# Altium PCB BUCK_CONVERTER.PcbDoc
Units mil, origin at the board's own origin, x right, y up, seen from the top; angles counter-clockwise.
Board outline 1155 x 780 mil, 2 copper layers (Top Layer, Bottom Layer); 9 components, 4 nets, 24 pads, 0 vias.
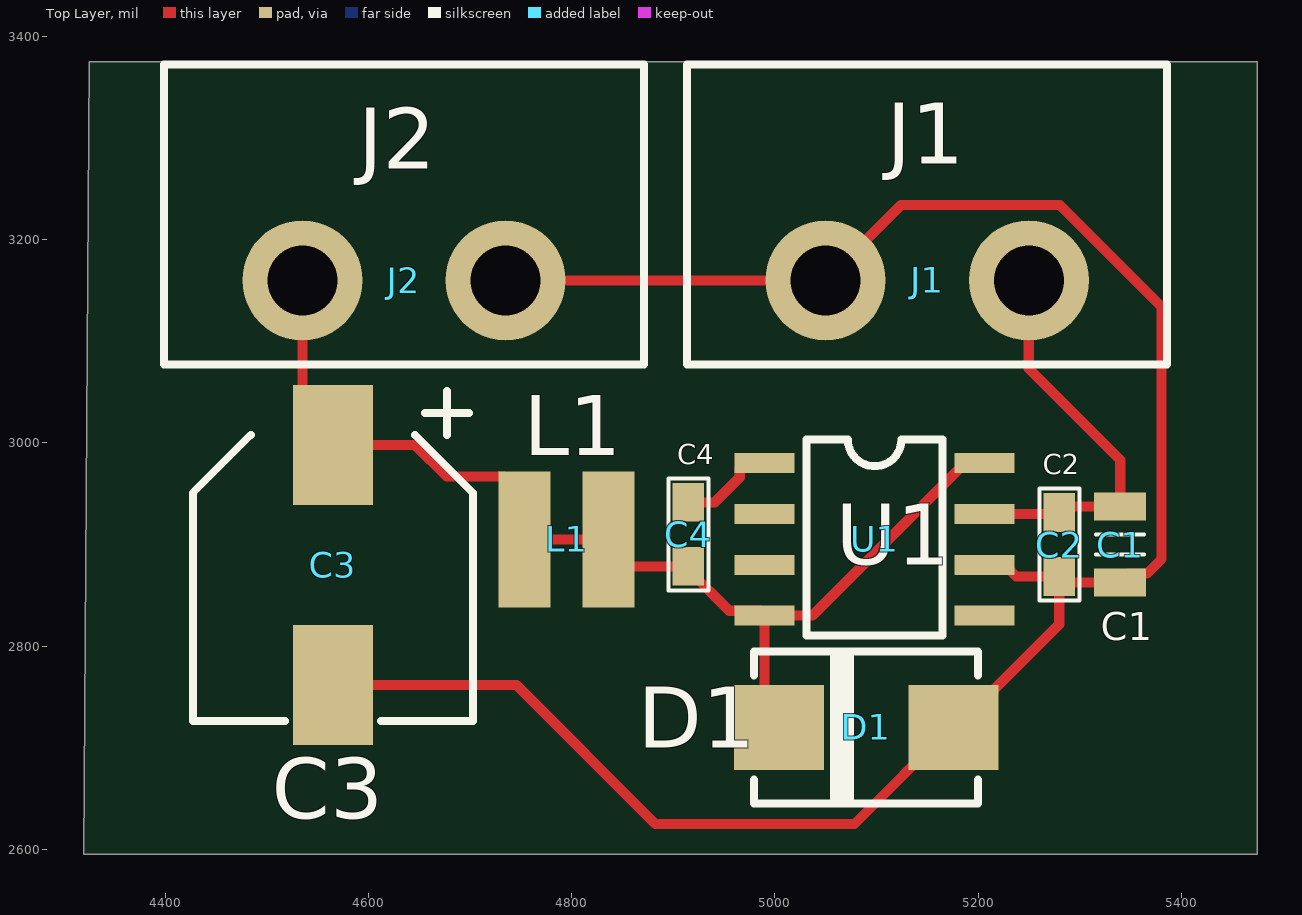
[diagram p0: Top Layer view]
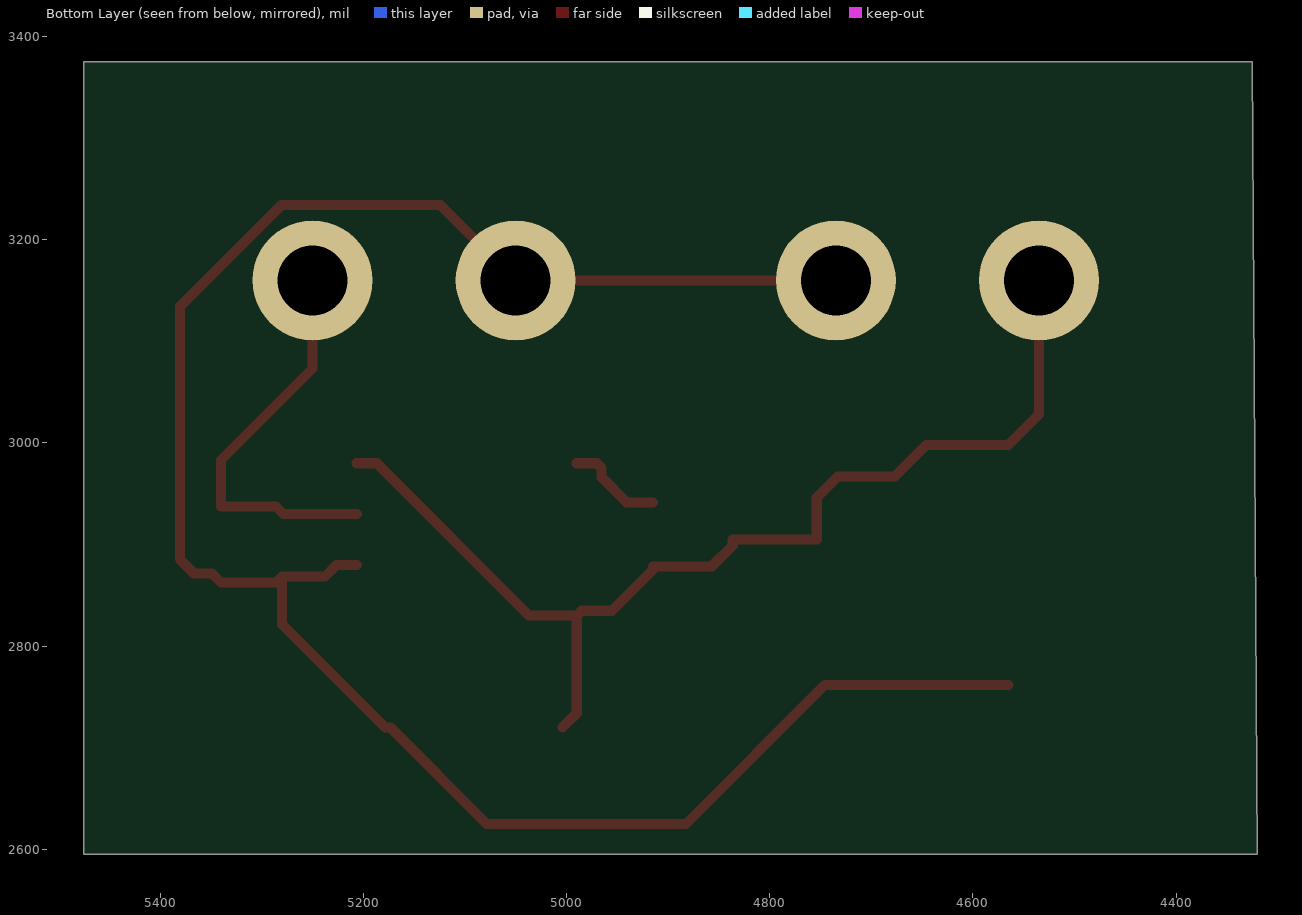
[diagram p1: Bottom Layer view, seen from below]
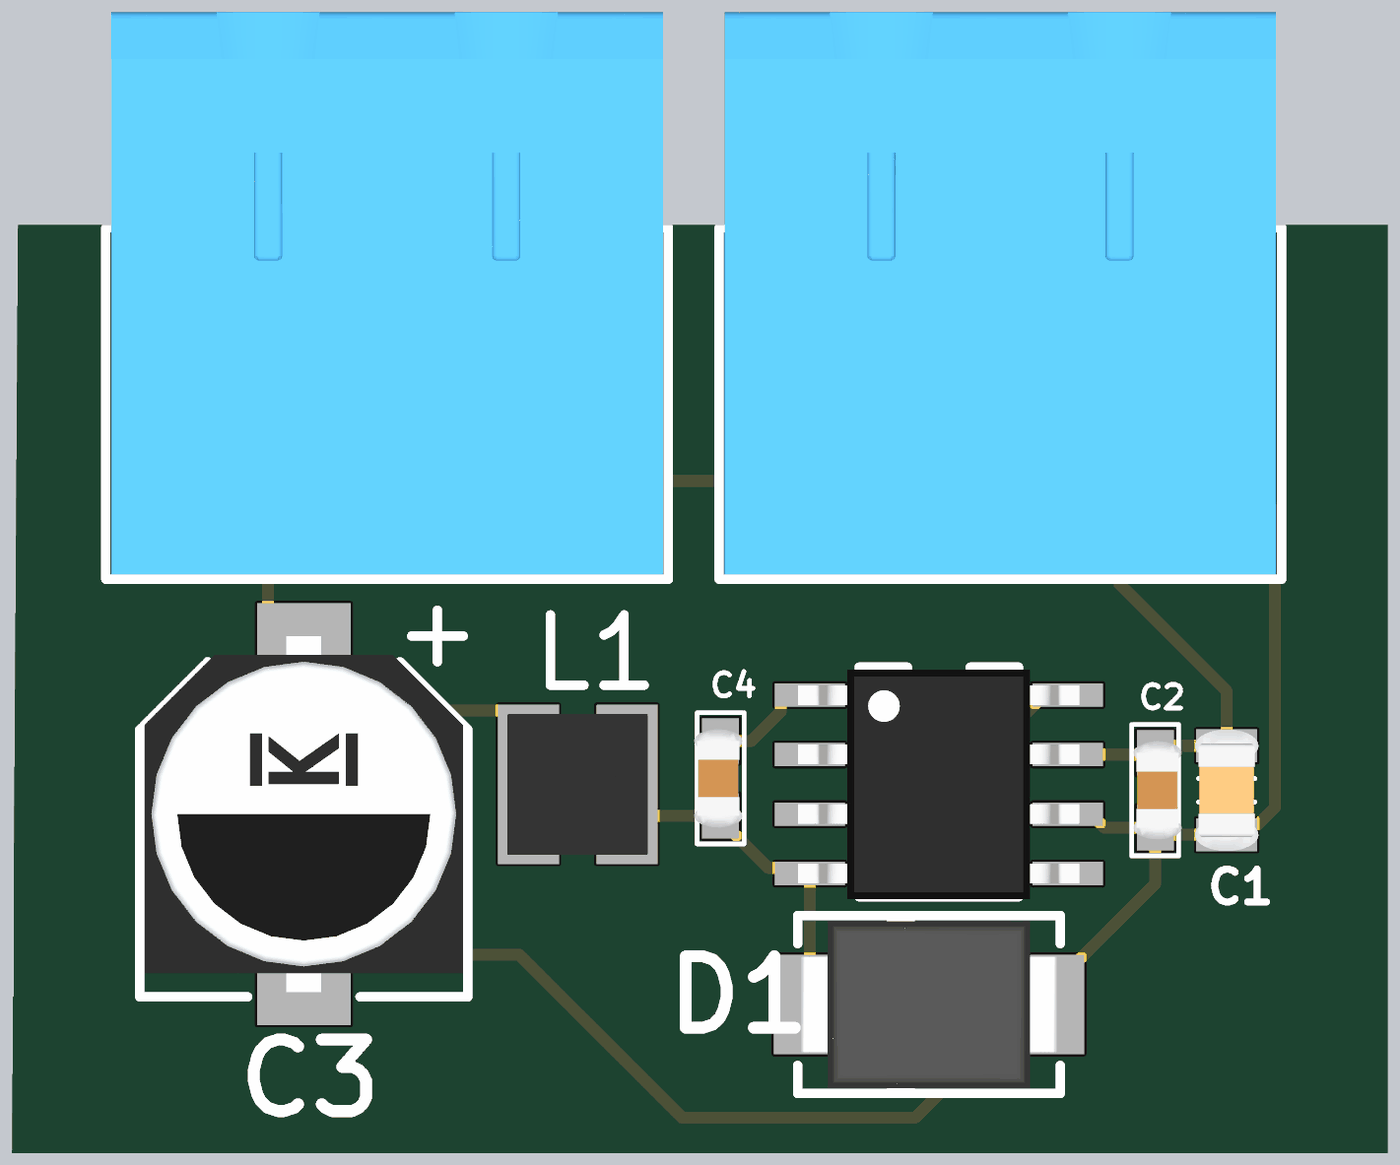
[diagram p2: 3D render of the assembled board from above, using the file's embedded part models]

## Layer stack, top to bottom
Top Solder: solder mask 0.4, Solder Resist, Dk 3.5
Top Layer: signal copper 1.4
Dielectric 1: dielectric 12.6, FR-4, Dk 4.8
Bottom Layer: signal copper 1.4
Bottom Solder: solder mask 0.4, Solder Resist, Dk 3.5

## Board outline
4325,3375 5475,3375 5475,2595 4320,2595

## Design rules (kind name [scope] priority, off if disabled: settings)
Clearance [All] p1: gap=10 ignorepadtopadclearanceinfootprint=FALSE
PolygonConnect [All] p1: connectstyle=Relief reliefconductorwidth=10 reliefentries=4 polygonreliefangle="90 Angle" airgapwidth=10
RoutingVias [All] p1: holewidth=28 width=50 viastyle="Through Hole" minholewidth=28 minwidth=50 maxholewidth=28 maxwidth=50
SolderMaskExpansion [All] p1: expansion=4 istentingtop=FALSE
Width [All] p1: maxlimit=10 minlimit=10 preferedwidth=10
30 further rules are at their usual default settings.

## Classes and differential pairs
component class buck_converter: C1 C2 C3 C4 D1 J2 L1 U1

## Components (designator, comment, footprint, x,y, rotation, side; value= is the part's Value field where it differs from the comment)
C1 "CL21B105KBFNNNE" CAP_0805 5340,2900 r90 top
C2 "0603B103K160CT" CAP_0603 5280,2900 r90 top
C3 "EEV686M035A9HAA" CAP_EEVseries 4565,2880 r270 top
C4 "0603B103K160CT" CAP_0603 4915,2910 r270 top
D1 "1SMB5919BT3G" SMB 5090,2720 r0 top
J1 "TBP01R1-508-02BE" TBP01R1-508 5150,3160 r180 top
J2 "TBP01R1-508-02BE" TBP01R1-508 4635,3160 r180 top
L1 "78438335470" IND_1212 4795,2905 r0 top
U1 "LM2675MX-12/NOPB" SOIC8 5098.27,2905 r270 top

## Footprints (in the part's own frame and the unit in brackets; to place one, negate y for a bottom-side part, rotate by r counter-clockwise, add the part's x,y. Pads: shape width x height; smd on the part's side, far side on the other; paste and mask are expansions set on the pad)
CAP_0603 [mil]
  rect 38x31 smd mask+1.97: 1(-31.5,0) 2(31.5,0)
  silkscreen extent -55,-20 55,20, body extent -41,-22 41,18, height 31
CAP_0805 [mm]
  rect 0.7x1.3 smd mask+0.05: 1(-0.95,0) 2(0.95,0)
  silkscreen extent -0.25,-0.6 0.25,0.6, body extent -1.3,-0.68 1.3,0.68, height 0.9
CAP_EEVseries [mm]
  rect 3x2 smd mask+0.05: 1(-3,0) 2(3,0)
  silkscreen extent -4.35,-3.5 3.9,3.5, body extent -3.8,-3.4 3.8,3.4, height 8.01
IND_1212 [mm]
  rect 1.3x3.4 smd mask+0.05: 1(-1.05,0) 2(1.05,0)
  body extent -1.5,-1.5 1.5,1.5, height 1.2
SMB [mm]
  rect 2.25x2.12 smd mask+0.05: A(2.185,0) C(-2.185,0)
  silkscreen extent -2.8,-1.9 2.8,1.9, body extent -2.72,-1.78 2.72,1.78, height 2.44
SOIC8 [mm]
  rect 0.5x1.5 smd mask+0.05: 1(-1.905,-2.75) 2(-0.635,-2.75) 3(0.635,-2.75) 4(1.905,-2.75) 5(1.905,2.75) 6(0.635,2.75) 7(-0.635,2.75) 8(-1.905,2.75)
  silkscreen extent -2.5,-1.7 2.4,1.7, body extent -2.45,-3 2.45,3, height 1.75
TBP01R1-508 [mm]
  round 3 hole 1.75 mask+0.05: 1(-2.54,0) 2(2.54,0)
  silkscreen extent -6,-5.4 6,2.1, body extent -5.88,-10 5.88,2, height 8.55

## Part data
C1: library part "CAP CER 1uF 0805", "CAP CER 1uF %10 0805", Capacitance=1uF, Case Code (Metric)=2012, Case Code (Imperial)=0805, Dielectric=X7R, Manufacturer=Samsung, Max Operating Temperature=125°C, Min Operating Temperature=-55°C, Package Quantity=1, Supplier Part Number 1=1276-1029-2-ND, Tolerance=10%, Voltage=50V, Case/Package=0805, Category="Ceramic Capacitors", ComponentLink1Description=https://datasheet.ciiva.com/25800/cl21b105kbfnnne-25800291.pdf?src-supplier=Digi-Key, ComponentLink1URL=https://datasheet.ciiva.com/25800/cl21b105kbfnnne-25800291.pdf?src-supplier=Digi-Key, ComponentLink2Description=https://datasheet.ciiva.com/16449/cl21b105kbfnnne-16449003.pdf?src-supplier=Future+Electronics, ComponentLink2URL=https://datasheet.ciiva.com/16449/cl21b105kbfnnne-16449003.pdf?src-supplier=Future+Electronics, ComponentLink3Description=https://datasheet.ciiva.com/26838/getdatasheetpartid-354075-26838668.pdf?src-supplier=Verical, ComponentLink3URL=https://datasheet.ciiva.com/26838/getdatasheetpartid-354075-26838668.pdf?src-supplier=Verical, Construction=Flat, Depth=1.25mm, Designed by="Yusuf DALAK", Height=1.25mm, Length=2mm, Manufacturer Part Number=CL21B105KBFNNNE, Mount="Surface Mount", Packaging="Tape and Reel", Pricing 1="2000=0,02138, 4000=0,01956 (USD)", Radiation Hardening=No, RoHS=Yes, RoHS Compliant=Yes, Series=CL, Stock 1=958000, Supplier 1=Digi-Key, Thickness=0.053inch, Voltage Rating=50V, Width=0.049inch
C2 C4: library part "CAP CER 10nF 0603", "CAP CER 10nF %10 0603", Capacitance=10nF, Case Code (Metric)=1608, Case Code (Imperial)=0603, Dielectric=X7R, Manufacturer="Walsin Technologies", Max Operating Temperature=125°C, Min Operating Temperature=-55°C, Supplier Part Number 1=1292-1384-1-ND, Tolerance=10%, Voltage Rating=16V, Case/Package=0603, Category="Ceramic Capacitors", ComponentLink1Description=http://www.farnell.com/datasheets/1958513.pdf?src-supplier=Farnell, ComponentLink1URL=http://www.farnell.com/datasheets/1958513.pdf?src-supplier=Farnell, ComponentLink2Description=http://components.arrow.com/part/dataview/0323_00656382?src-supplier=Arrow+Europe, ComponentLink2URL=http://components.arrow.com/part/dataview/0323_00656382?src-supplier=Arrow+Europe, ComponentLink3Description=http://www.farnell.com/datasheets/1958513.pdf?src-supplier=Element14, ComponentLink3URL=http://www.farnell.com/datasheets/1958513.pdf?src-supplier=Element14, ComponentLink4Description=http://www.passivecomponent.com/wp-content/uploads/2018/10/MLCC.pdf?src-supplier=Digi-Key, ComponentLink4URL=http://www.passivecomponent.com/wp-content/uploads/2018/10/MLCC.pdf?src-supplier=Digi-Key, Depth=0.8mm, Designed by="Yusuf DALAK", Length=1.6mm, Manufacturer Part Number=0603B103K160CT, Packaging="Tape and Reel", Pricing 1="1=0,10000, 10=0,03600, 50=0,01940, 100=0,01590, 500=0,01136, 1000=0,00892 (USD)", REACH SVHC=Unknown, RoHS=Yes, RoHS Compliant=Yes, Stock 1=102474, Supplier 1=Digi-Key, Voltage Rating (DC)=16V
C3: library part "CAP ALU 68uF", "Cap Aluminum Lytic 68uF 35V 20% (6.3 X 7.7mm) SMD 280mA 2000h 105C T/R", Capacitance=68uF, Case/Package=Radial, Manufacturer=KEMET, Max Operating Temperature=105°C, Min Operating Temperature=-40°C, Package Quantity=1, Ripple Current=196mA, Supplier Part Number 1=399-6722-1-ND, Tolerance=20%, Voltage Rating=35V, Category="Aluminum Electrolytic Capacitors", ComponentLink1Description=https://datasheet.ciiva.com/5365/kem-a4002-eev-535332-5365784.pdf?src-supplier=Mouser, ComponentLink1URL=https://datasheet.ciiva.com/5365/kem-a4002-eev-535332-5365784.pdf?src-supplier=Mouser, Designator by="Yusuf DALAK", Height - Seated (Max)=0.315inch, Length=7.7mm, Life (Hours)=2000Hour, Manufacturer Part Number=EEV686M035A9HAA, Mount="Surface Mount", Packaging="Tape and Reel", Pricing 1="1=0,54000, 10=0,38000, 50=0,28740, 100=0,25040, 500=0,18546 (USD)", RoHS=Yes, RoHS Compliant=Yes, Series=EEV, Stock 1=543, Supplier 1=Digi-Key, Termination=SMD/SMT, Voltage Rating (DC)=35V, Impedance=340mR
D1: "Diode Zener Single 5.6V 5% 3W 2-Pin SMB T/R", Breakdown Voltage=5.88V, Case/Package=SMB, Forward Voltage=1.5V, Manufacturer="ON Semiconductor", Max Operating Temperature=150°C, Max Power Dissipation=3W, Max Reverse Current=5uA, Min Operating Temperature=-65°C, Package Quantity=1, Power Dissipation=550mW, Supplier Part Number 1=1SMB5919BT3GOSCT-ND, Test Current=66.9mA, Tolerance=5%, Voltage Rating (DC)=5.6V, Zener Current=267mA, Category="Zener Diodes", ComponentLink1Description=https://datasheet.ciiva.com/27747/1308331-27747654.pdf?src-supplier=Jameco, ComponentLink1URL=https://datasheet.ciiva.com/27747/1308331-27747654.pdf?src-supplier=Jameco, ComponentLink2Description=https://datasheet.ciiva.com/1182/1smb5913bt3-d-1182657.pdf?src-supplier=Element14, ComponentLink2URL=https://datasheet.ciiva.com/1182/1smb5913bt3-d-1182657.pdf?src-supplier=Element14, ComponentLink3Description=https://datasheet.ciiva.com/1182/1smb5913bt3-d-1182658.pdf?src-supplier=Element14, ComponentLink3URL=https://datasheet.ciiva.com/1182/1smb5913bt3-d-1182658.pdf?src-supplier=Element14, ComponentLink4Description=https://datasheet.ciiva.com/895/1smb5913bt3-d-895203.pdf?src-supplier=Digi-Key, ComponentLink4URL=https://datasheet.ciiva.com/895/1smb5913bt3-d-895203.pdf?src-supplier=Digi-Key, ComponentLink5Description=https://datasheet.ciiva.com/895/1smb5913bt3-d-895204.pdf?src-supplier=Digi-Key, ComponentLink5URL=https://datasheet.ciiva.com/895/1smb5913bt3-d-895204.pdf?src-supplier=Digi-Key, ComponentLink6Description=https://datasheet.ciiva.com/895/1smb5913bt3-d-895205.pdf?src-supplier=Digi-Key, ComponentLink6URL=https://datasheet.ciiva.com/895/1smb5913bt3-d-895205.pdf?src-supplier=Digi-Key, ComponentLink7Description=https://datasheet.ciiva.com/15198/getdatasheetpartid-311040-15198695.pdf?src-supplier=Verical, ComponentLink7URL=https://datasheet.ciiva.com/15198/getdatasheetpartid-311040-15198695.pdf?src-supplier=Verical, ComponentLink8Description=https://datasheet.ciiva.com/16311/1smb5913bt3-d-16311847.pdf?src-supplier=Future+Electronics, ComponentLink8URL=https://datasheet.ciiva.com/16311/1smb5913bt3-d-16311847.pdf?src-supplier=Future+Electronics, ComponentLink9Description=https://datasheet.ciiva.com/16472/1smb5913bt3-d-16472779.pdf?src-supplier=Avnet+Asia, ComponentLink9URL=https://datasheet.ciiva.com/16472/1smb5913bt3-d-16472779.pdf?src-supplier=Avnet+Asia, Contact Plating=Tin,Matte, Designed by="Yusuf DALAK", Element Configuration=Single, ESD Protection=Yes, Halogen Free="Halogen Free", Height=2.13mm, Lead Free="Lead Free", Length=4.32mm, Manufacturer Part Number=1SMB5919BT3G, Material=Plastic, Max Reverse Leakage Current=5uA, Number of Pins=2, Packaging="Tape and Reel", Power Rating=3W, Pricing 1="1=0,45000, 10=0,31900, 100=0,16110, 500=0,14274, 1000=0,11109 (USD)", Radiation Hardening=No, REACH SVHC="No SVHC", RoHS=Yes, Supplier 1=Digi-Key, Voltage Tolerance=5%, Width=3.56mm, Working Voltage=5.6V, Zener Voltage=5.6V, Impedance=2R
J1 J2: "Conn Shrouded Header HDR 2 POS 5.08mm Solder RA Side Entry Thru-Hole Bag", Manufacturer=CUI, Supplier Part Number 1=102-6406-ND, Designed by="Yusuf DALAK", Manufacturer Part Number=TBP01R1-508-02BE, Pricing 1="1=0,50000, 10=0,26500, 25=0,18760, 50=0,15960, 100=0,15400, 250=0,13020, 500=0,12040, 1000=0,10640, 5000=0,08120 (USD)", RoHS=No, Stock 1=3398, Supplier 1=Digi-Key
L1: library part "IND 47uH", "FIXED IND 47UH 390MA 2.3 OHM SMD", Case Code (Metric)=3030, Case Code (Imperial)=1212, Current Rating=390mA, DC Resistance (DCR)=2.3R, Manufacturer="Wurth Electronics", Max Operating Temperature=125°C, Min Operating Temperature=-40°C, Ratings=AEC-Q200, Resistor Type=Wirewound, Saturation Current=1.18A, Self Resonant Frequency=8MHz, Supplier Part Number 1=732-6947-1-ND, Test Frequency=100kHz, Tolerance=30%, Inductance=47uH, Case/Package=1212, Category="Fixed Inductors", ComponentLink1Description=https://media.digikey.com/pdf/Data%20Sheets/Wurth%20Electronics%20PDFs/Q+_Products_Flyer.pdf?src-supplier=Digi-Key, ComponentLink1URL=https://media.digikey.com/pdf/Data%20Sheets/Wurth%20Electronics%20PDFs/Q+_Products_Flyer.pdf?src-supplier=Digi-Key, Core Material=Ferrite, Designed by="Yusuf DALAK", Height - Seated (Max)=0.059inch, Length=0.118inch, Manufacturer Part Number=78438335470, Mount="Surface Mount", Packaging="Tape and Reel", Pricing 1="1=1,98000, 50=1,84800, 250=1,69100, 500=1,56800 (USD)", RoHS=No, RoHS Compliant=No, Shielding=Shielded, Stock 1=885, Supplier 1=Digi-Key, Width=0.118inch
U1: "Switching Voltage Regulators Pwr Cnvtr Hi Eff 1A SD Vtg Reg", Case/Package="SOIC N", Manufacturer="TI National Semiconductor", Max Operating Temperature=125°C, Max Output Current=1A, Max Input Voltage=40V, Min Operating Temperature=-40°C, Min Input Voltage=8V, Output Voltage=12V, Package Quantity=2500, Quiescent Current=2.5mA, Supplier Part Number 1=296-35410-1-ND, Switching Frequency=260kHz, Category="Voltage Regulators - Switching", ComponentLink1Description=https://datasheet.ciiva.com/41457/001013881-da-01-en-ic-reg-buck-lm2675mx-12-nopb-soic-8-tid-41457896.pdf?src-supplier=Conrad, ComponentLink1URL=https://datasheet.ciiva.com/41457/001013881-da-01-en-ic-reg-buck-lm2675mx-12-nopb-soic-8-tid-41457896.pdf?src-supplier=Conrad, ComponentLink2Description=https://datasheet.ciiva.com/3220/lm2675-3220840.pdf?src-supplier=Avnet, ComponentLink2URL=https://datasheet.ciiva.com/3220/lm2675-3220840.pdf?src-supplier=Avnet, Contact Plating=Tin, Designed by="Yusuf DALAK", Efficiency=94%, Lead Free="Lead Free", Manufacturer Part Number=LM2675MX-12/NOPB, Mount="Surface Mount", Number of Outputs=1, Number of Pins=8, Operating Supply Voltage=40V, Output Current=1A, Output Type=Fixed, Packaging="Tape and Reel", Pricing 1="1=4,49000, 10=4,03600, 25=3,81600, 100=3,13760, 250=2,81536, 500=2,71360, 1000=2,25568 (USD)", Radiation Hardening=No, RoHS=Yes, RoHS Compliant=Yes, Series=LM2675, Stock 1=1475, Supplier 1=Digi-Key, Synchronous Rectifier=No

## Nets (pads, with @x,y where several pads share a name; then routed paths per layer and width w, separated by ;. In a path a pad name is that pad's centre, name@x,y a point inside that pad or via, vN(x,y) a via of type N, cw(c..) or ccw(c..) an arc to the next point about the centre after c; other vN are vias at no path point)
5VDC: C3.1 C4.2 D1.C J2.2 L1.1 L1.2 U1.4 U1.8 | length 1093.1
  Top Layer w10: J2.2 4535,3028.11 C3.1 4645.63,2998.11 4676.81,2966.93 4733.07,2966.93 4753.66,2946.34 L1.1 L1.2 4836.34,2899.09 4856.93,2878.5 C4.2 4915,2875 4955.16,2834.84 4985.16,2834.84 U1.4 ; D1.C 4990,2733.98 U1.4 ; U1.8 5186.85,2980 5036.85,2830 U1.4
12VDC: C1.2 C2.2 J1.1 U1.7 | length 396.4
  Top Layer w10: U1.7 5278.5,2930 C2.2 5285.9,2937.4 5328.19,2937.4 C1.2 5340,2983.17 5250,3073.17 J1.1
GND: C1.1 C2.1 C3.2 D1.A J1.2 J2.1 U1.6 | length 2057.1
  Top Layer w10: C3.2 4745.59,2761.89 4882.48,2625 5078.46,2625 5173.46,2720 D1.A 5178.58,2720 5280,2821.42 C2.1 ; J2.1 J1.2 5124.06,3234.06 5280.67,3234.06 5380.59,3134.14 5380.59,2885.59 5366.38,2871.38 5348.78,2871.38 C1.1 5285.9,2862.6 C2.1 ; U1.6 5226.22,2880 5237.72,2868.5 C2.1
NetC4_1: C4.1 U1.1 | length 96.3
  Top Layer w10: C4.1 4940.92,2941.5 4965.47,2966.06 4965.47,2975.16 4970.31,2980 U1.1
pads on no net: U1.2 U1.3 U1.5